# Altium PCB PCB1.PcbDoc
Units mil, origin at the board's own origin, x right, y up, seen from the top; angles counter-clockwise.
Board outline 3420 x 3410 mil, 2 copper layers (Top Layer, Bottom Layer); 21 components, 21 nets, 90 pads, 0 vias.
Unrouted connection lines stored in the file: 28.
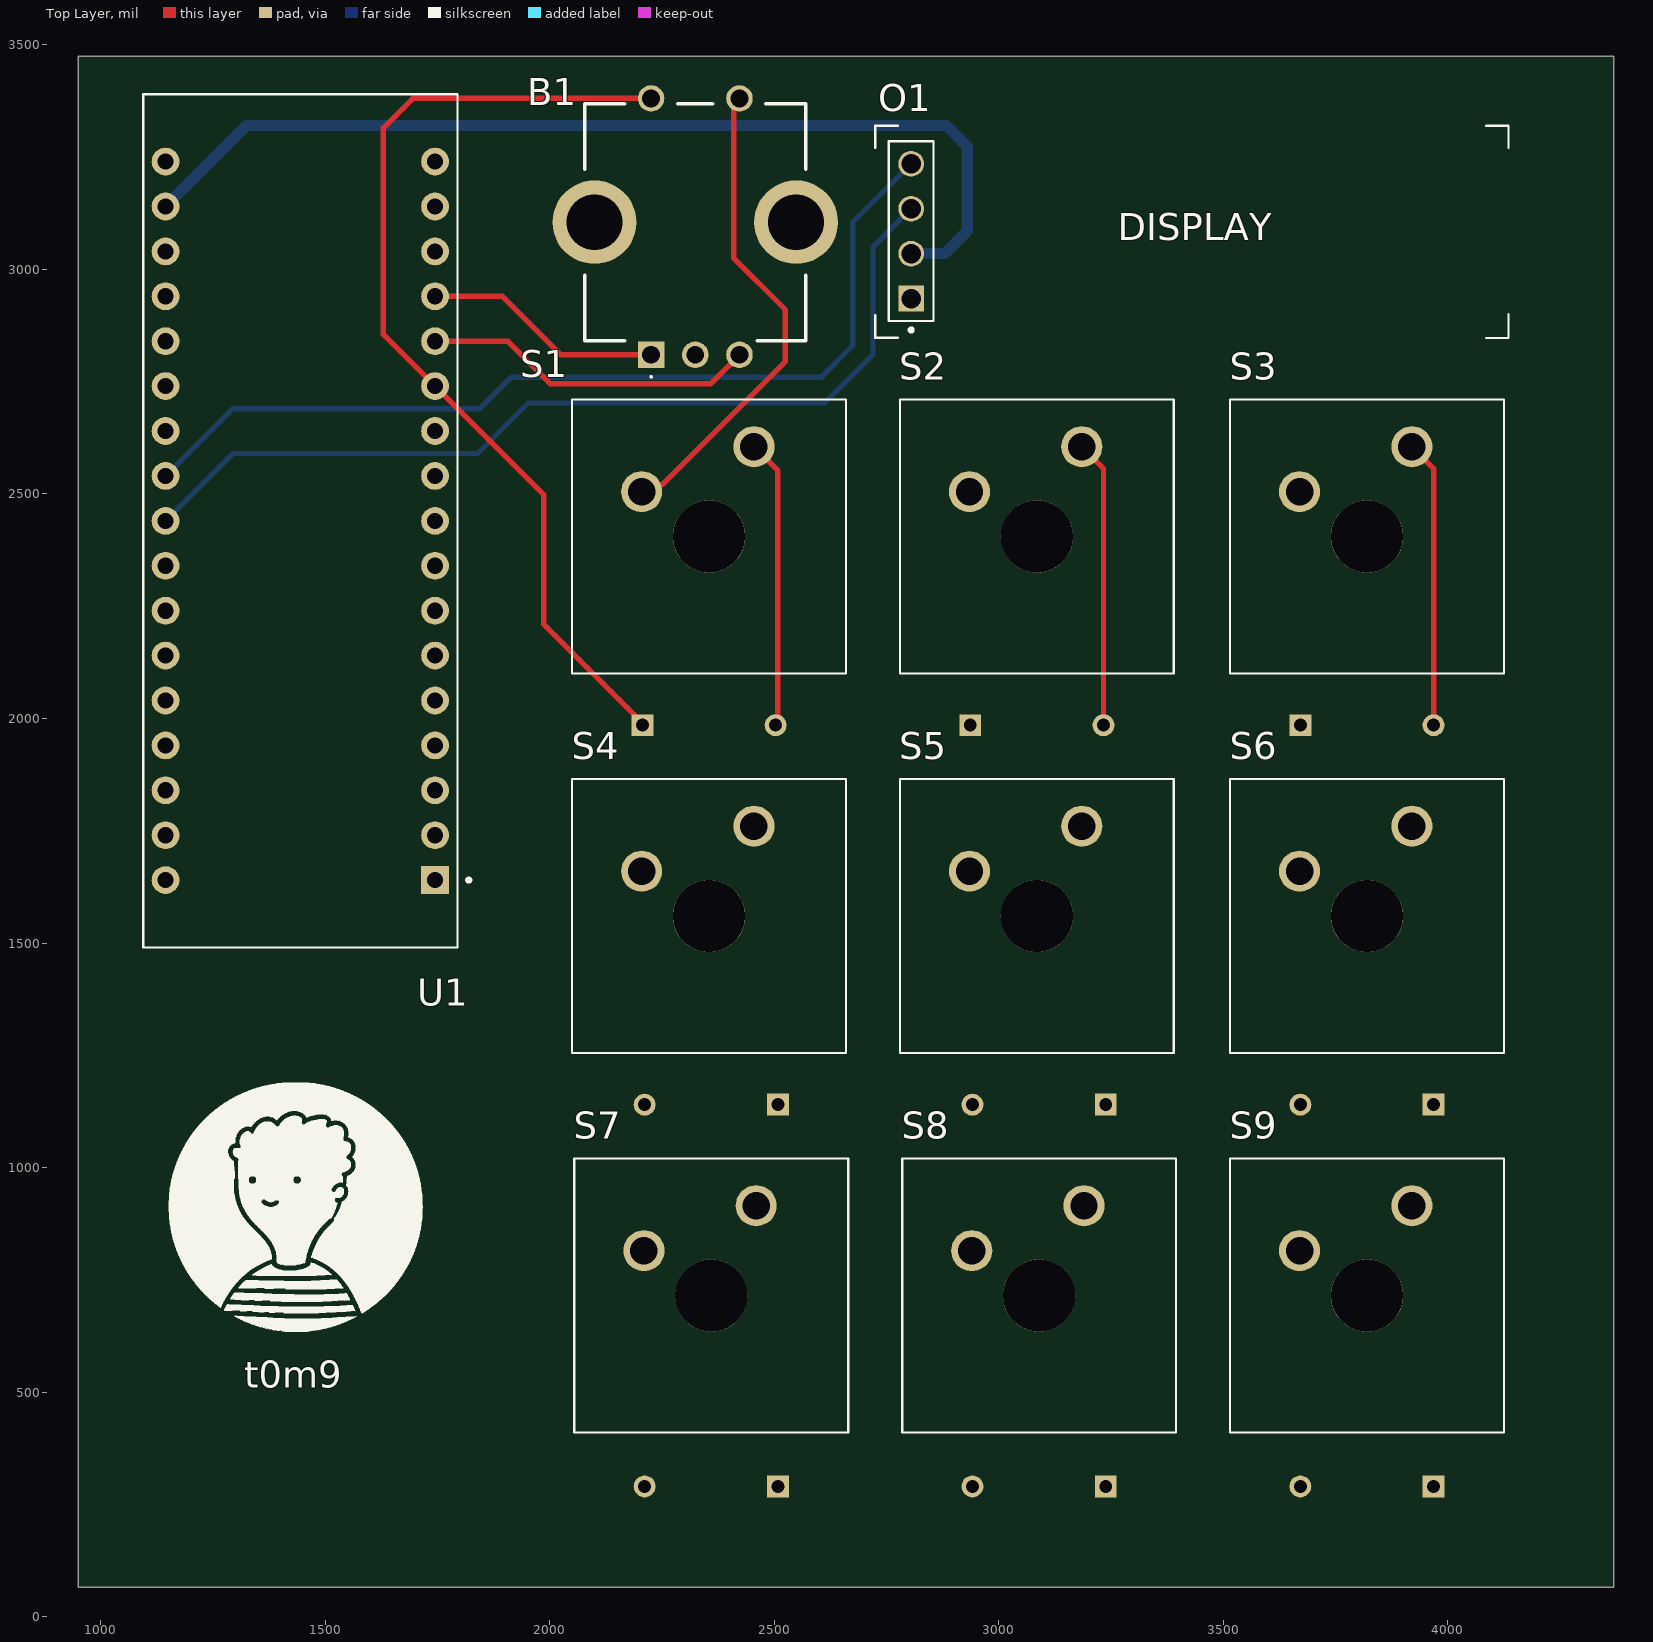
[diagram p0: Top Layer view]
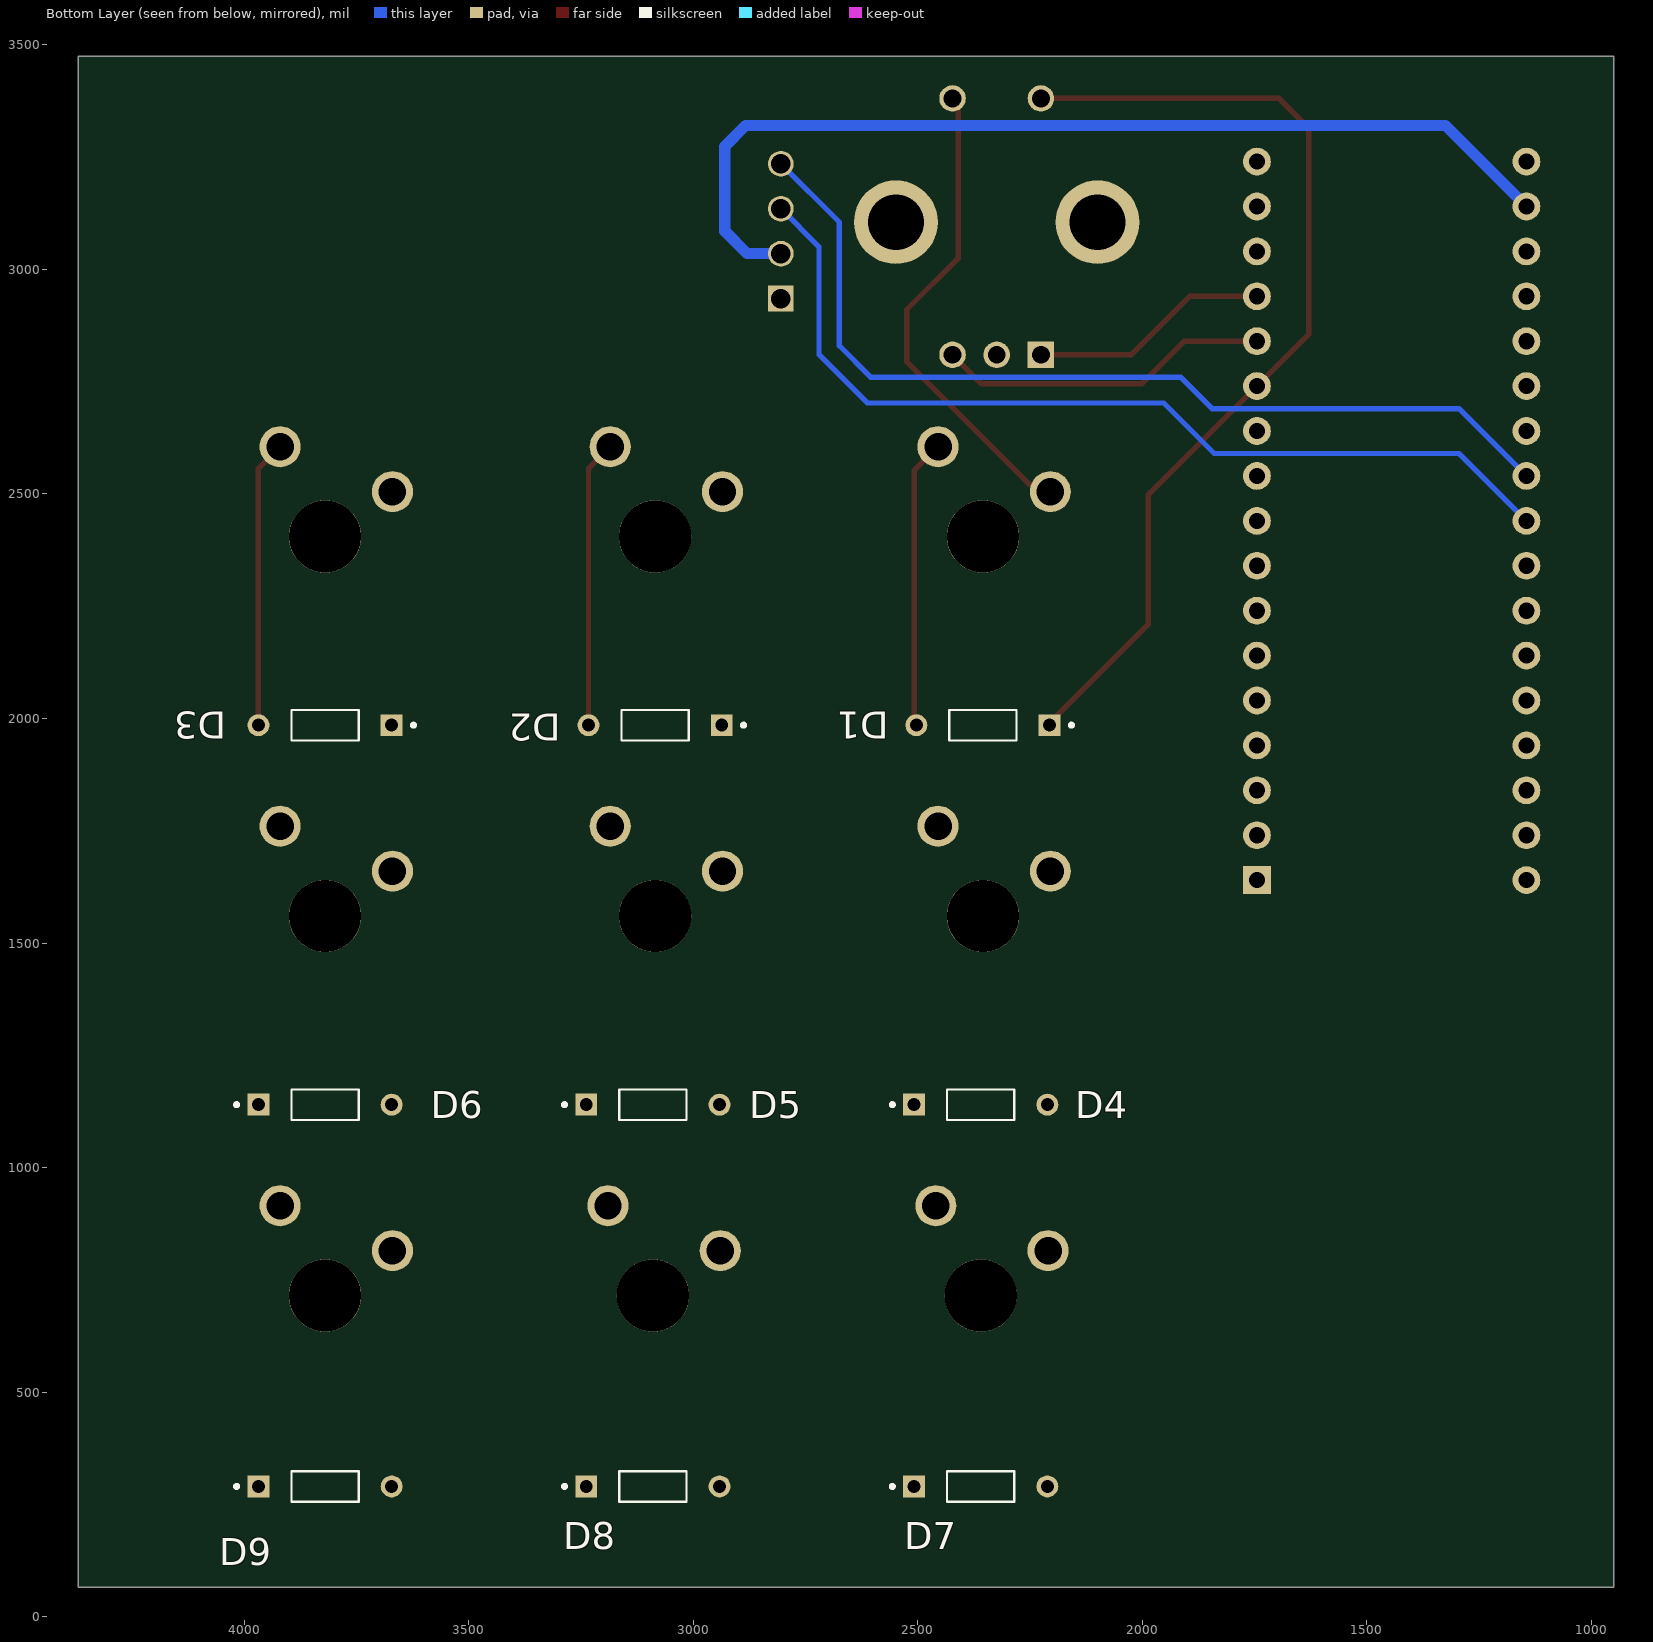
[diagram p1: Bottom Layer view, seen from below]

## Layer stack, top to bottom
Top Solder: solder mask 0.4, Solder Resist, Dk 3.5
Top Layer: signal copper 1.4
Dielectric 1: dielectric 12.6, FR-4, Dk 4.8
Bottom Layer: signal copper 1.4
Bottom Solder: solder mask 0.4, Solder Resist, Dk 3.5

## Board outline
950,65 4370,65 4370,3475 950,3475

## Design rules (kind name [scope] priority, off if disabled: settings)
Clearance [All] p1: gap=10 ignorepadtopadclearanceinfootprint=FALSE
PolygonConnect [All] p1: connectstyle=Relief reliefconductorwidth=10 reliefentries=4 polygonreliefangle="90 Angle" airgapwidth=10
RoutingVias [All] p1: holewidth=28 width=50 viastyle="Through Hole" minholewidth=28 minwidth=50 maxholewidth=28 maxwidth=50
SolderMaskExpansion [All] p1: expansion=4 istentingtop=FALSE
SupplyNets "Schematic Supply Nets" [InNet('GND')] p1: voltage=0.000
Width [All] p1: maxlimit=100 minlimit=10 preferedwidth=12 minimp=50.000000 maximp=50.000000 favimp=50.000000
30 further rules are at their usual default settings.

## Components (designator, comment, footprint, x,y, rotation, side; value= is the part's Value field where it differs from the comment)
B1 "PEC11R-4325F-S0012" PEC11R-4315F-S0012 2225.98,2809.72 r0 top
D1 "1N4148" "1N4148 Diode" 2355,1985 r0 bottom
D2 "1N4148" "1N4148 Diode" 3085,1985 r0 bottom
D3 "1N4148" "1N4148 Diode" 3820,1985 r0 bottom
D4 "1N4148" "1N4148 Diode" 2360,1140 r180 bottom
D5 "1N4148" "1N4148 Diode" 3090,1140 r180 bottom
D6 "1N4148" "1N4148 Diode" 3820,1140 r180 bottom
D7 "1N4148" "1N4148 Diode" 2360,290 r180 bottom
D8 "1N4148" "1N4148 Diode" 3090,290 r180 bottom
D9 "1N4148" "1N4148 Diode" 3820,290 r180 bottom
O1 "WINSTAR OLED Display" "WINSTAR OLED DISPLAY" 2955,3095 r0 top
S1 "MX1A-11NN" SW_MX1A-11NN 2355,2405 r0 top
S2 "MX1A-11NN" SW_MX1A-11NN 3085,2405 r0 top
S3 "MX1A-11NN" SW_MX1A-11NN 3820,2405 r0 top
S4 "MX1A-11NN" SW_MX1A-11NN 2355,1560 r0 top
S5 "MX1A-11NN" SW_MX1A-11NN 3085,1560 r0 top
S6 "MX1A-11NN" SW_MX1A-11NN 3820,1560 r0 top
S7 "MX1A-11NN" SW_MX1A-11NN 2360,715 r0 top
S8 "MX1A-11NN" SW_MX1A-11NN 3090,715 r0 top
S9 "MX1A-11NN" SW_MX1A-11NN 3820,715 r0 top
U1 "Arduino Micro" "Arduino Micro" 1445,2440 r180 top

## Footprints (in the part's own frame and the unit in brackets; to place one, negate y for a bottom-side part, rotate by r counter-clockwise, add the part's x,y. Pads: shape width x height; smd on the part's side, far side on the other; paste and mask are expansions set on the pad)
"1N4148 Diode" [mm]
  round 1.238 hole 0.73: A(3.768,0)
  rect 1.238x1.238 / inner round 1.238 / far side rect 1.238x1.238 hole 0.73: K(-3.768,0)
  silkscreen extent -5.1,-0.86 1.9,0.86, body extent -4,-0.95 4,0.96, height 1.9
"Arduino Micro" [mil]
  rect 62x62 / inner round 62 / far side rect 62x62 hole 36: 1(-300,800)
  round 62 hole 36: 2(-300,700) 3(-300,600) 4(-300,500) 5(-300,400) 6(-300,300) 7(-300,200) 8(-300,100) 9(-300,0) 10(-300,-100) 11(-300,-200) 12(-300,-300) 13(-300,-400) 14(-300,-500) 15(-300,-600) 16(-300,-700) 17(-300,-800) 18(300,-800) 19(300,-700) 20(300,-600) 21(300,-500) 22(300,-400) 23(300,-300) 24(300,-200) 25(300,-100) 26(300,0) 27(300,100) 28(300,200) 29(300,300) 30(300,400) 31(300,500) 32(300,600) 33(300,700) 34(300,800)
  silkscreen extent -379,-950 350,950, body extent -350,-1002 350,950, height 470
PEC11R-4315F-S0012 [mm]
  round 1.5 hole 1: 1(0,14.5) 2(5,14.5) B1(5,0) C1(2.5,0)
  round 4.74 hole 3.16: 3(-3.2,7.5) 4(8.2,7.5)
  rect 1.5x1.5 hole 1: A1(0,0)
  silkscreen extent -3.75,-1.3 8.75,14.2, body extent -4.05,-0.13 9.14,14.62, height 24.5
SW_MX1A-11NN [mil]
  round 91.5 hole 61: 1(-150,100) 2(100,200)
  round 161 hole 161 unplated: ""(0,0)
  silkscreen extent -305,-305 305,305, body extent -305,-319 305,319, height 600
"WINSTAR OLED DISPLAY" [mm] "WEA012832FWPP3N00000"
  rect 1.45x1.45 / inner round 1.45 / far side rect 1.45x1.45 hole 1.1: 1(-3.81,-4.064)
  round 1.45 hole 1.1: 2(-3.81,-1.524) 3(-3.81,1.016) 4(-3.81,3.556)
  silkscreen extent -5.84,-6.29 29.97,5.71, body extent -5.08,-5.33 -2.54,4.83, height 5.57

## Part data
B1: library part PEC11R-4315F-S0012, "Rotary Encoder Mechanical 12 Quadrature (Incremental) Vertical", Manufacturer_Name=Bourns, Mouser Part Number=652-PEC11R4325FS0012, Datasheet Link=https://www.bourns.com/docs/product-datasheets/pec11r.pdf, Geometry.Height=31.5mm, Manufacturer_Part_Number=PEC11R-4325F-S0012, Mouser Price/Stock=https://www.mouser.co.uk/ProductDetail/Bourns/PEC11R-4325F-S0012?qs=Zq5ylnUbLm4xKJFZnkQTMQ%3D%3D
D1 D2 D3 D4 D5 D6 D7 D8 D9: "Diode Standard 75V 200mA Surface Mount SOD-523F", Package="AXIAL LEAD-2 ON Semiconductor", Check_prices=https://www.snapeda.com/parts/1N4148/Onsemi/view-part/?ref=eda, MF="ON Semiconductor", MP=1N4148, SnapEDA_Link=https://www.snapeda.com/parts/1N4148/Onsemi/view-part/?ref=snap
O1: "WEA012832FWPP3N00000", ComponentLink1Description="New link", ComponentLink1URL=https://www.soselectronic.com/pl-pl/products/winstar/wea012832fwpp3n00000-401631
S1 S2 S3 S4 S5 S6 S7 S8 S9: "Switch,Key,SPST-NO,Keyboard,Low Profile,10mA,12VDC,Face Place Mount,Std Force", Package=None, Check_prices=https://www.snapeda.com/parts/MX1A-11NN/Cherry/view-part/?ref=eda, MF=Cherry, MP=MX1A-11NN, SnapEDA_Link=https://www.snapeda.com/parts/MX1A-11NN/Cherry/view-part/?ref=snap
U1: "Microcontroller board based on the ATmega32u4", Package="Non-Standard Arduino", Check_prices=https://www.snapeda.com/parts/Arduino%20Micro/Arduino/view-part/?ref=eda, MF=Arduino, MP="Arduino Micro", SnapEDA_Link=https://www.snapeda.com/parts/Arduino%20Micro/Arduino/view-part/?ref=snap

## Nets (pads, with @x,y where several pads share a name; then routed paths per layer and width w, separated by ;. In a path a pad name is that pad's centre, name@x,y a point inside that pad or via, vN(x,y) a via of type N, cw(c..) or ccw(c..) an arc to the next point about the centre after c; other vN are vias at no path point)
COL_0: B1.2 S1.1 S4.1 S7.1 U1.7 | length 1078.7
  Top Layer w12: S1.1 2220.21,2520.21 2250.21,2520.21 2525,2795 2525,2910 2410,3025 2410,3355.02 2422.83,3367.86 B1.2
COL_1: S2.1 S5.1 S8.1 U1.8
COL_2: S3.1 S6.1 S9.1 U1.9
GND: B1.3 B1.4 B1.C1 O1.1 U1.6 U1.31
NetD1_A: D1.A S1.2 | length 642.1
  Top Layer w12: S1.2 2508.37,2551.63 D1.A@2508.37,1985
NetD2_A: D2.A S2.2 | length 640
  Top Layer w12: S2.2 3233.37,2556.63 D2.A
NetD3_A: D3.A S3.2 | length 640
  Top Layer w12: S3.2 3968.37,2556.63 D3.A
NetD4_A: D4.A S4.2
NetD5_A: D5.A S5.2
NetD6_A: D6.A S6.2
NetD7_A: D7.A S7.2
NetD8_A: D8.A S8.2
NetD9_A: D9.A S9.2
ROT_0: B1.B1 U1.13 | length 744
  Top Layer w12: U1.13 1906.72,2840 2001.72,2745 2358.11,2745 B1.B1
ROT_1: B1.A1 U1.14 | length 534.9
  Top Layer w12: U1.14 1895,2940 2025.28,2809.72 B1.A1
ROW_0: B1.1 D1.K D2.K D3.K U1.12 | length 2194.1
  Top Layer w12: D1.K@2211.63,1985 1986.63,2210 1986.63,2498.37 U1.12 1630,2855 1630,3315 1695.59,3380.59 B1.1
ROW_1: D4.K D5.K D6.K U1.11
ROW_2: D7.K D8.K D9.K U1.10
SCL: O1.3 U1.26 | length 2088.5
  Bottom Layer w12: U1.26 1295,2590 1840,2590 1952.5,2702.5 2612.5,2702.5 2720,2810 2720,3050 O1.3
SDA: O1.4 U1.25 | length 2109
  Bottom Layer w12: U1.25 1295,2690 1845,2690 1915,2760 2605,2760 2675,2830 2675,3105 O1.4
VIN: O1.2 U1.19 | length 2213.1
  Bottom Layer w25: U1.19 1325,3320 2883.61,3320 2930,3273.61 2930,3085 2880,3035 O1.2
pads on no net: S1. S2. S3. S4. S5. S6. S7. S8. S9. U1.1 U1.2 U1.3 U1.4 U1.5 U1.15 U1.16 U1.17 U1.18 U1.20 U1.21 U1.22 U1.23 U1.24 U1.27 U1.28 U1.29 U1.30 U1.32 U1.33 U1.34

## Silkscreen, mask and mechanical layers (free items; w line width, h text height)
Top Overlay:
  drawing of 7 lines, arcs and shapes, not listed
  text "t0m9" at 1320,510 h60

## Text inside footprints (layer, text, board x,y; h text height)
O1: Top Overlay "DISPLAY" at 3265,3065 h60